# Altium PCB BATTERY_BOARD.PcbDoc
Units mm, origin at the board's own origin, x right, y up, seen from the top; angles counter-clockwise.
Board outline 51 x 49.23 mm, 2 copper layers (Top Layer, Bottom Layer), stack 1.071 mm thick; 36 components, 28 nets, 113 pads, 24 vias.
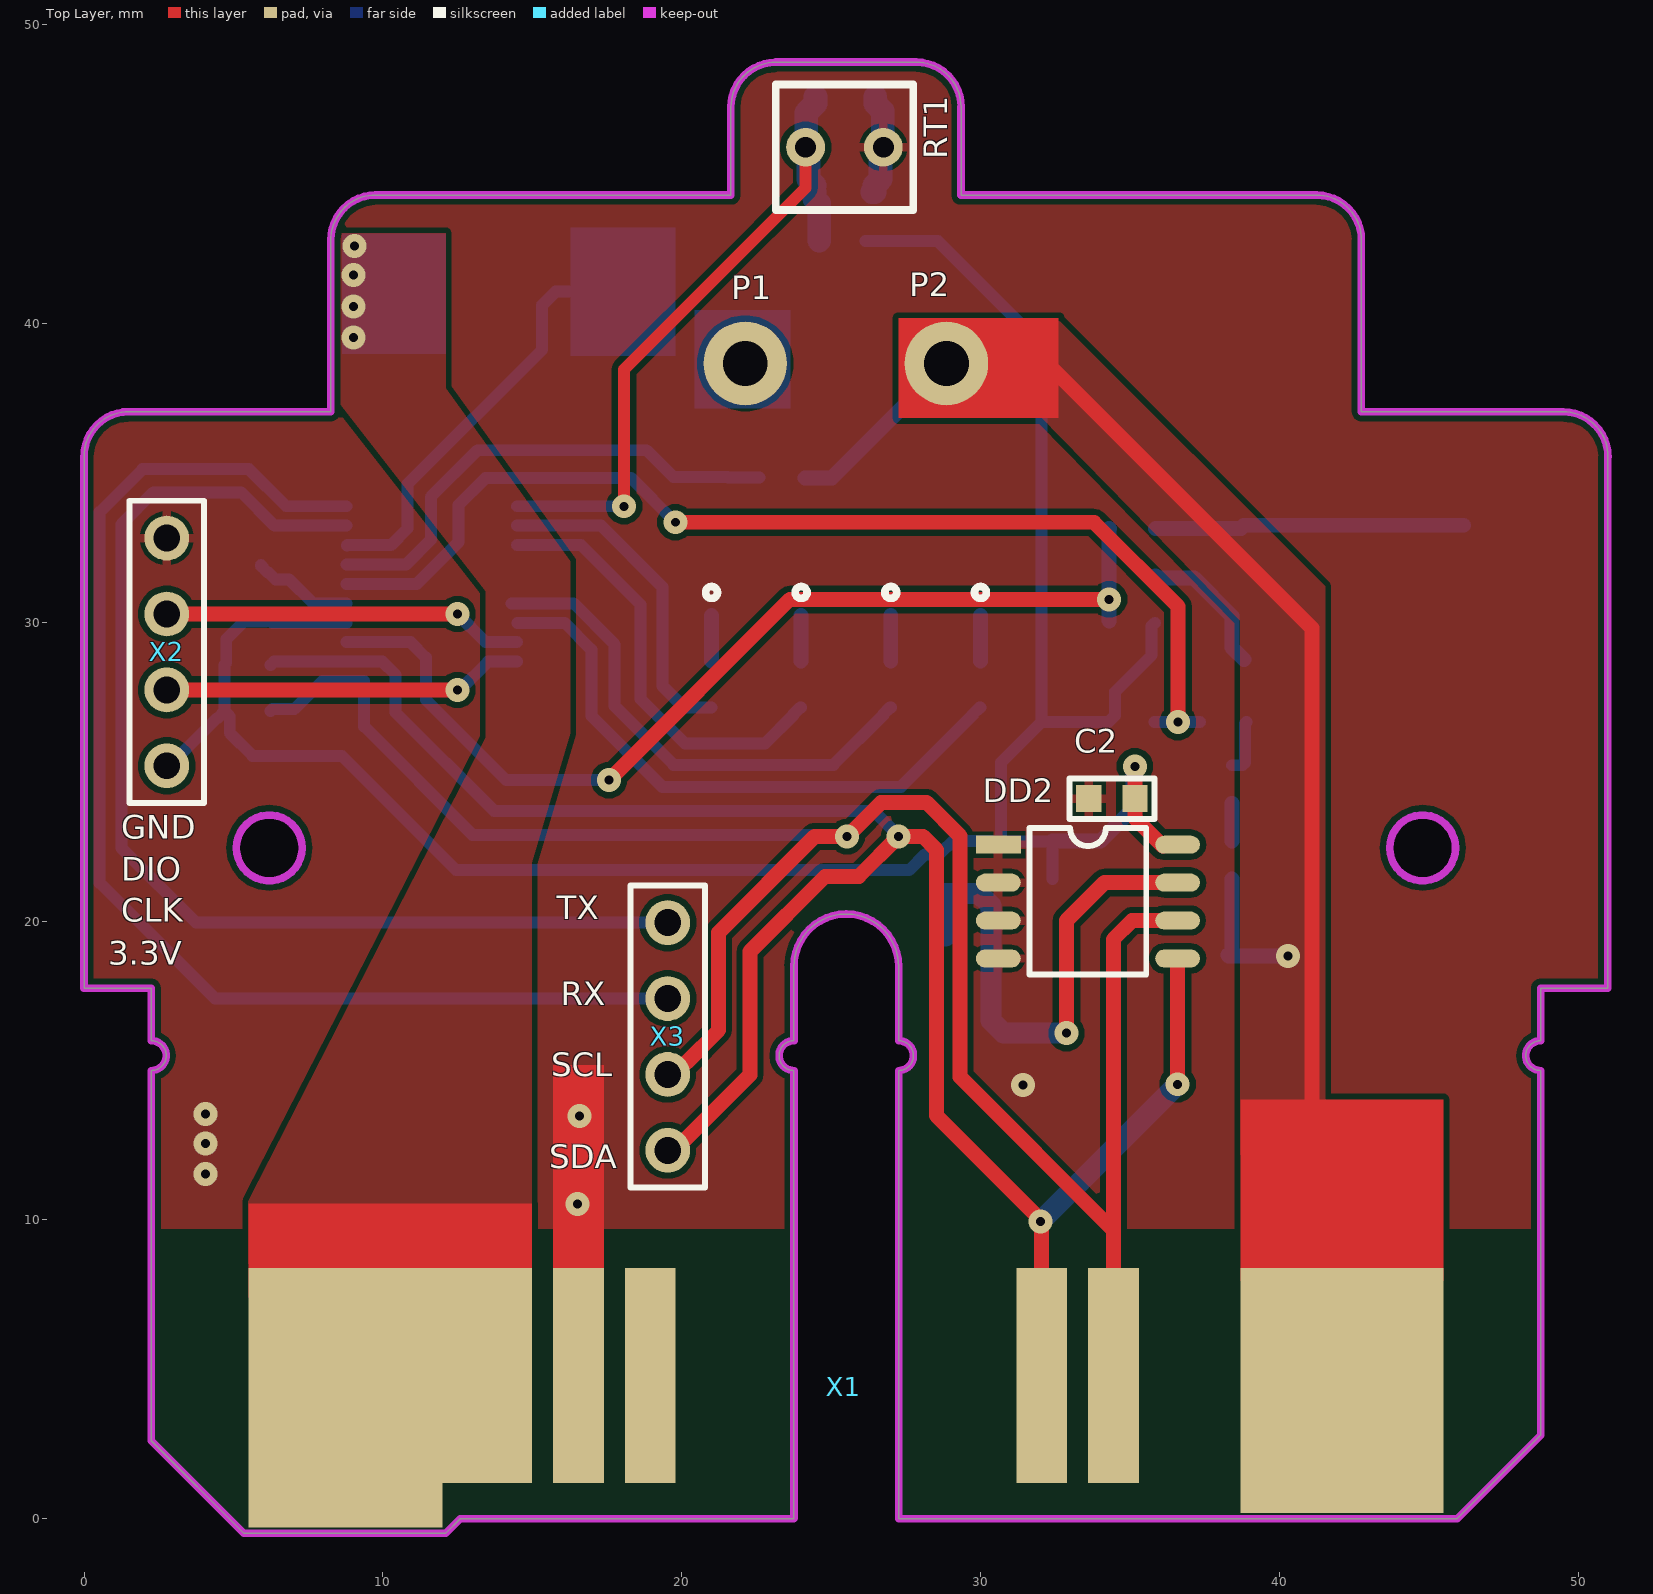
[diagram p0: Top Layer view]
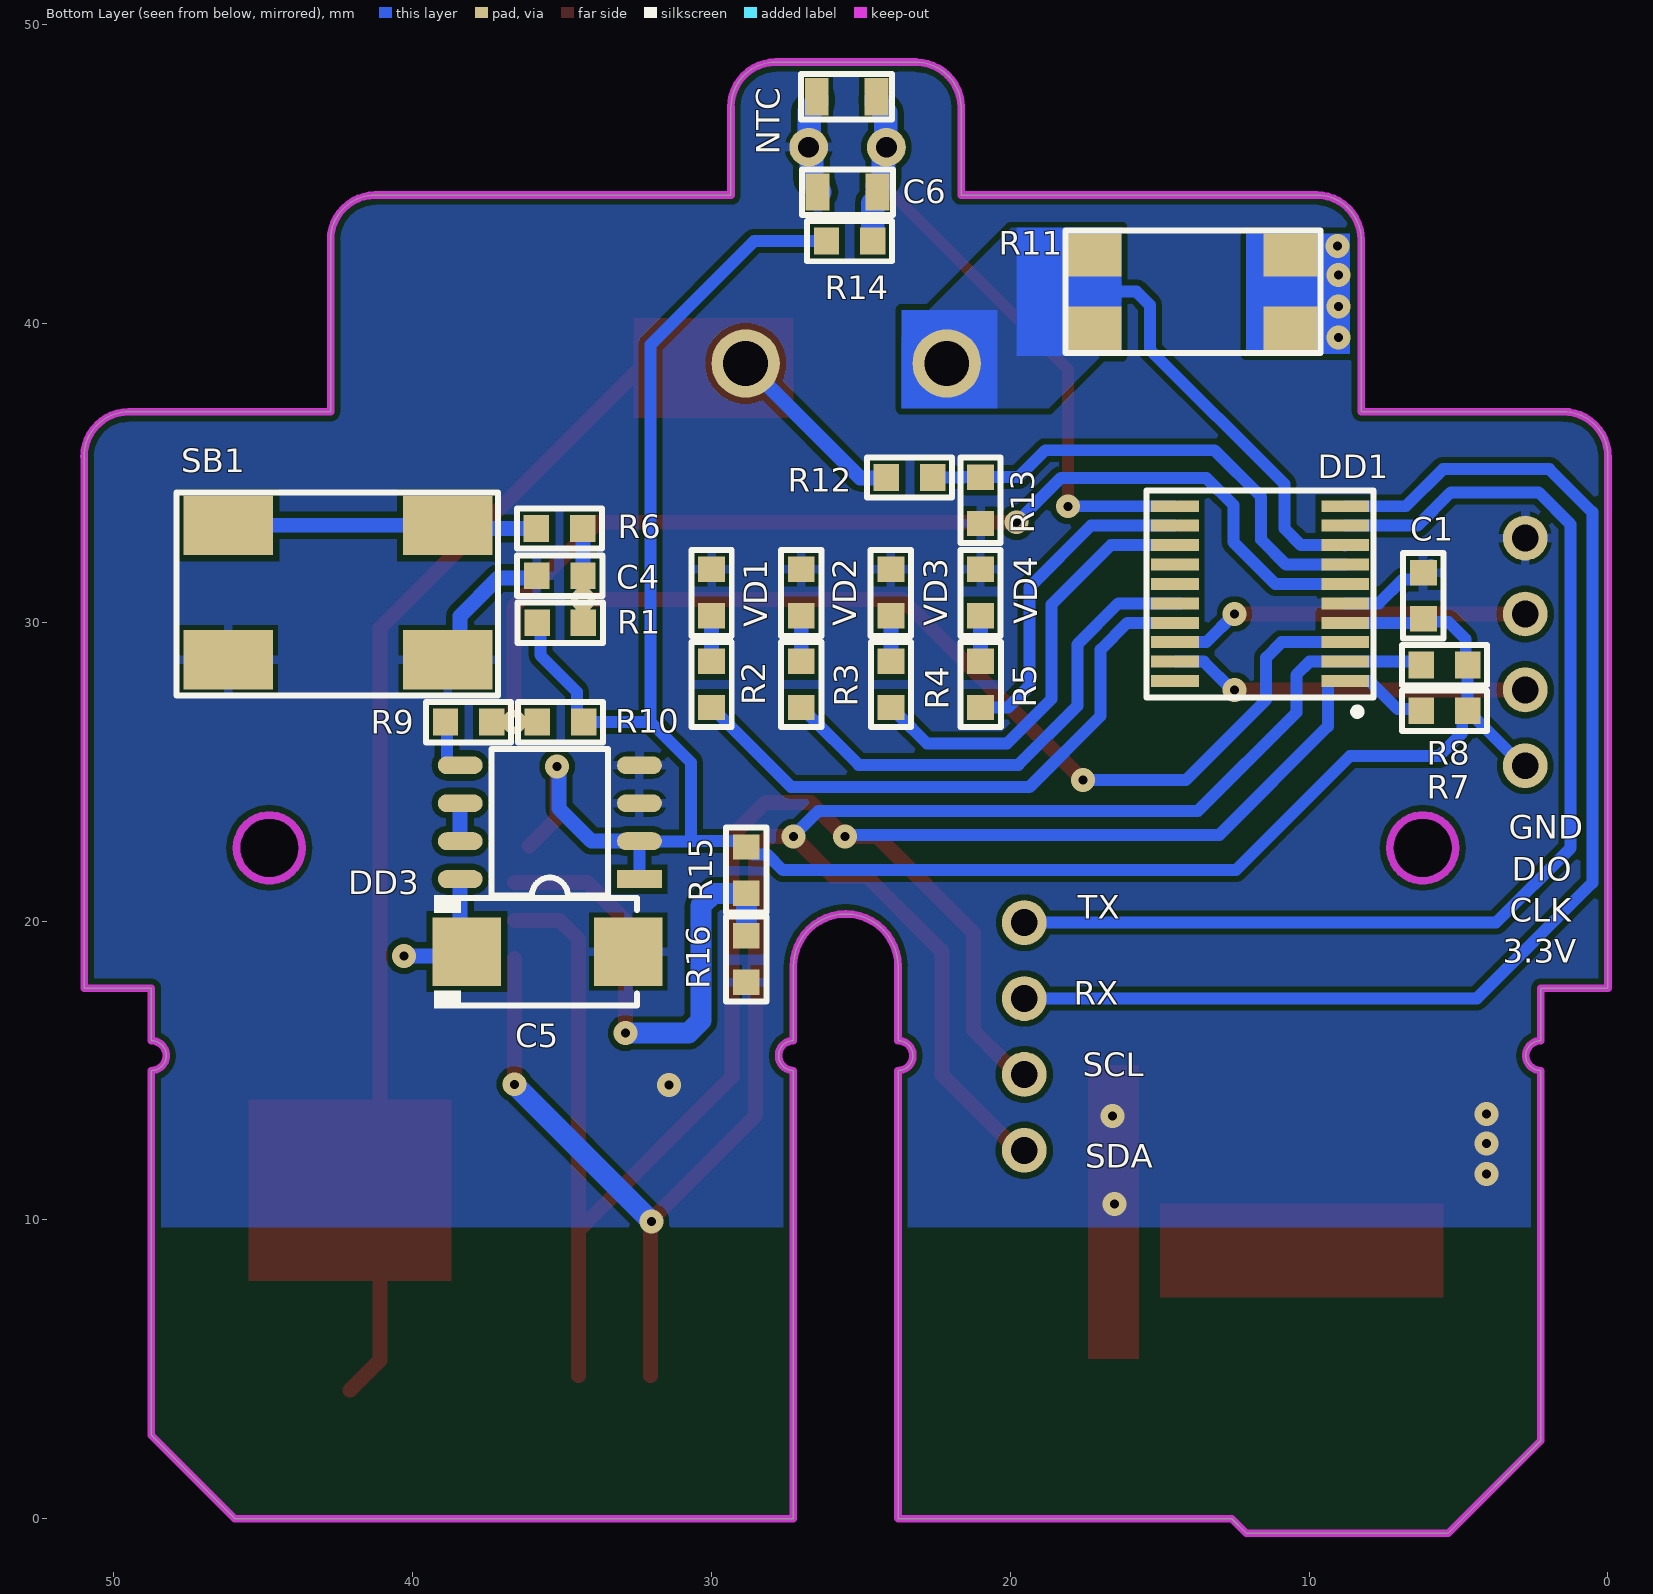
[diagram p1: Bottom Layer view, seen from below]
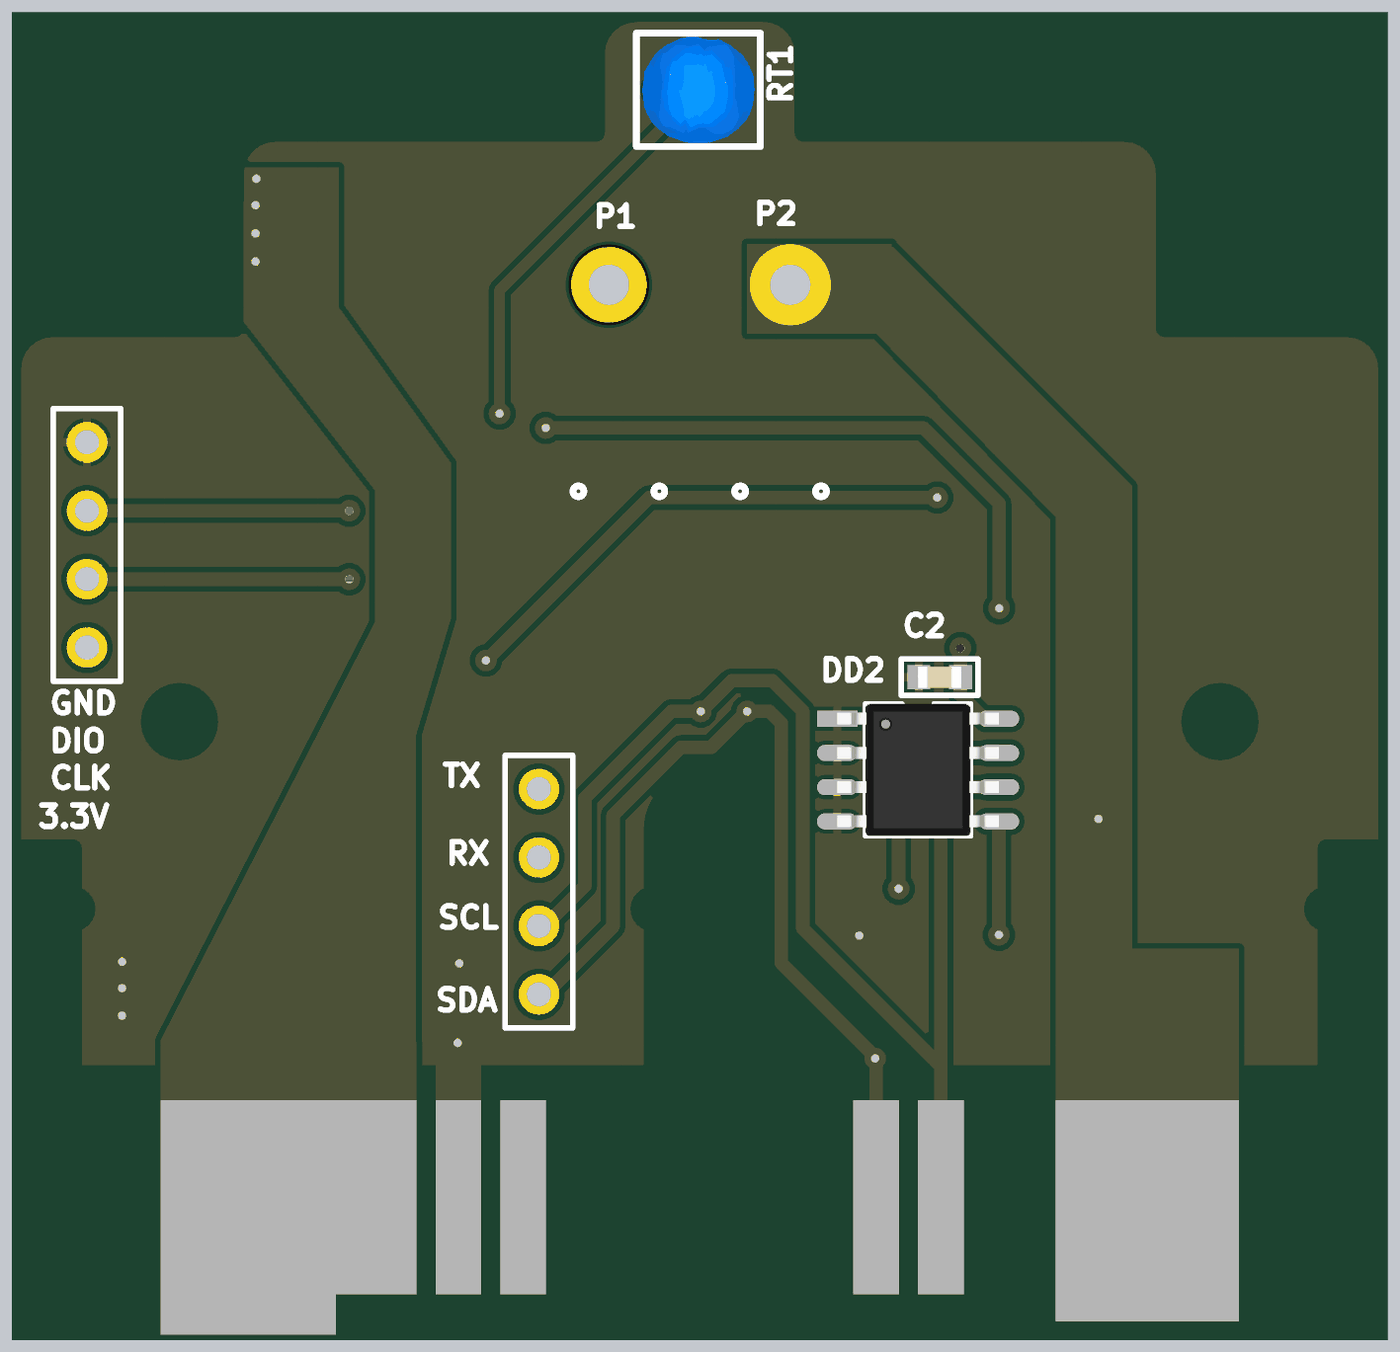
[diagram p2: 3D render of the assembled board from above, using the file's embedded part models]
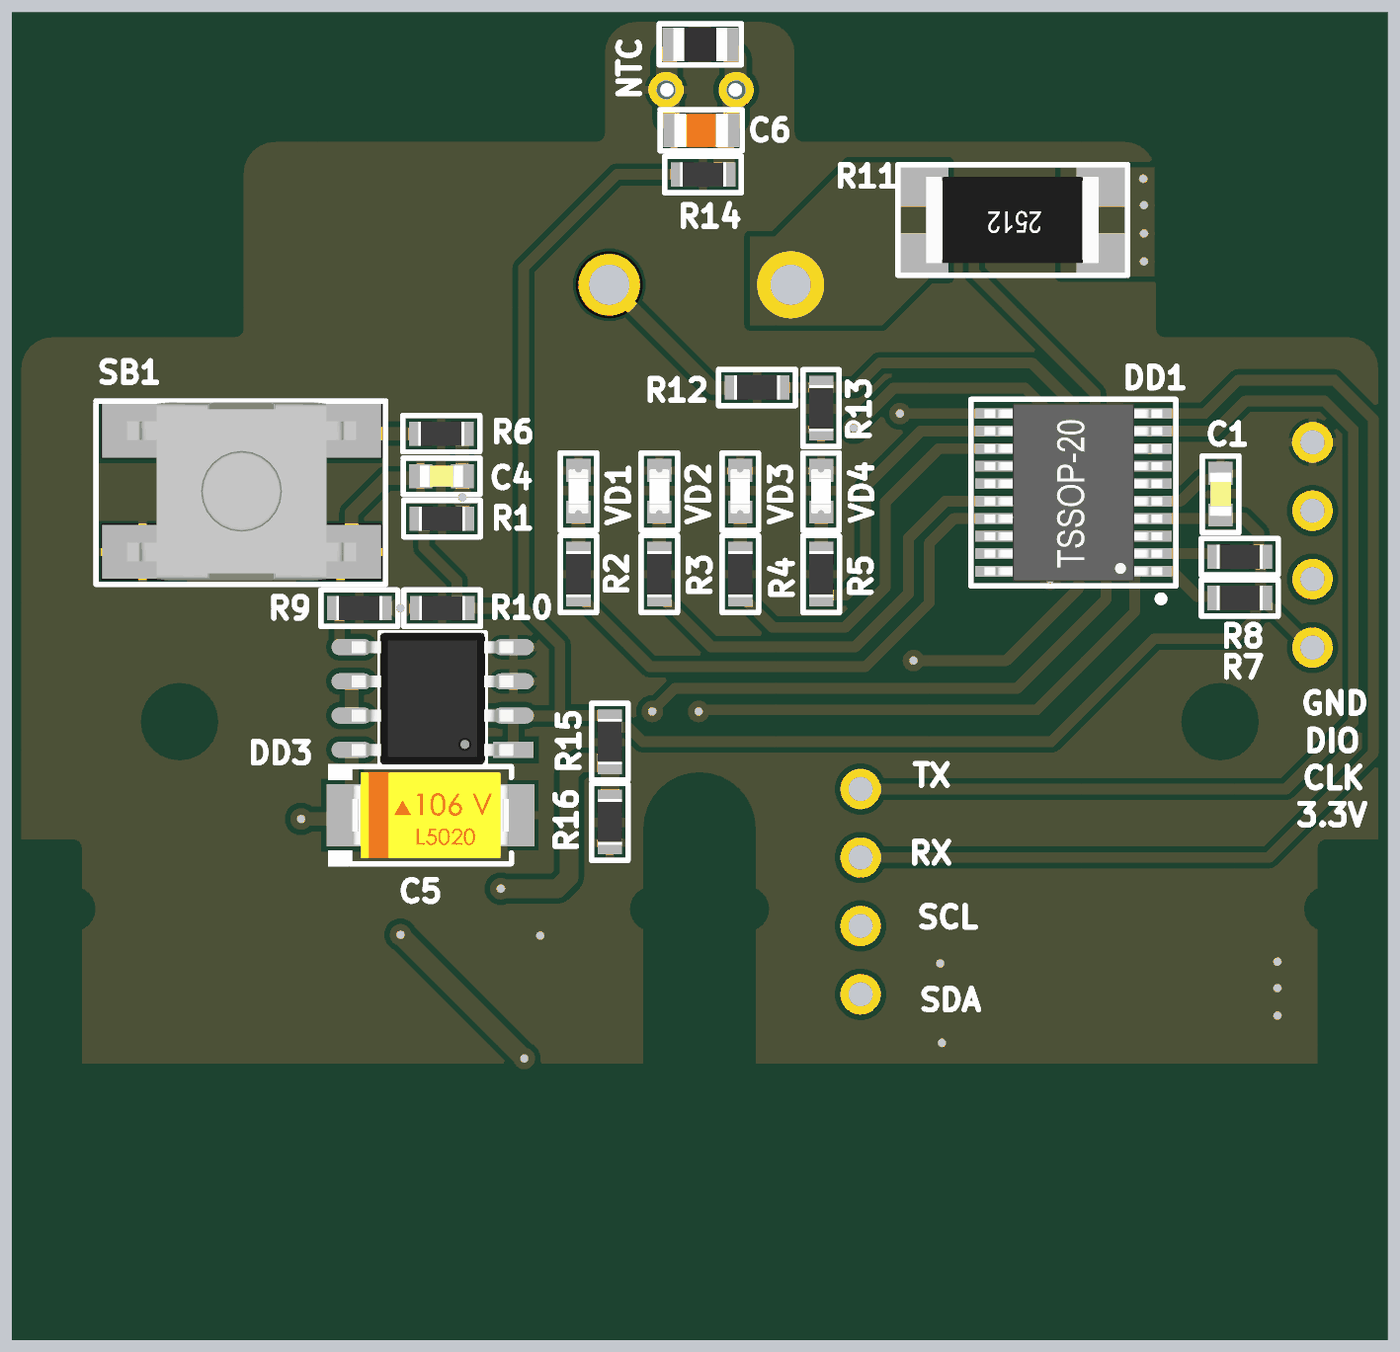
[diagram p3: 3D render of the assembled board from below, using the file's embedded part models]

## Layer stack, top to bottom
Top Solder: solder mask 0.0102, Solder Resist, Dk 3.5
Top Layer: signal copper 0.0356
Dielectric 1: dielectric 1, FR-4, Dk 4.8
Bottom Layer: signal copper 0.0356
Bottom Solder: solder mask 0.0102, Solder Resist, Dk 3.5

## Board outline
2.25,2.61 2.25,15 ccw(c2.25,15.5) 2.25,16 2.25,17.752 0,17.752 0,35.552 cw(c1.5,35.552) 1.5,37.052 8.25,37.052 8.25,42.802 8.26,42.802 cw(c9.76,42.802) 9.76,44.302 9.75,44.302 21.65,44.302 21.65,47.242 cw(c23.15,47.242) 23.15,48.742 23.15,48.752 27.85,48.752 27.852,48.75 cw(c27.852,47.25) 29.352,47.25 29.35,47.252 29.35,44.302 41.25,44.302 41.252,44.3 cw(c41.252,42.8) 42.752,42.8 42.75,42.802 42.75,37.052 49.5,37.052 49.502,37.05 cw(c49.502,35.55) 51.002,35.55 51,35.552 51,17.752 48.75,17.752 48.75,16 ccw(c48.75,15.5) 48.75,15 48.75,2.802 45.95,0.002 27.26,0.002 27.26,15 ccw(c27.26,15.5) 27.26,16 27.26,18.49 ccw(c25.51,18.49) 23.76,18.49 23.76,16 ccw(c23.76,15.5) 23.76,15 23.76,0.012 23.75,0.002 12.592,0.002 12.11,-0.48 5.34,-0.48
cut-out: 43.7,22.452 ccw(c44.8,22.452) 44.8,21.352 ccw(c44.8,22.452) 45.9,22.452 ccw(c44.8,22.452) 44.8,23.552 ccw(c44.8,22.452)
cut-out: 5.1,22.452 ccw(c6.2,22.452) 6.2,21.352 ccw(c6.2,22.452) 7.3,22.452 ccw(c6.2,22.452) 6.2,23.552 ccw(c6.2,22.452)

## Design rules (kind name [scope] priority, off if disabled: settings)
Clearance [All] p1: gap=0.2 ignorepadtopadclearanceinfootprint=FALSE except(0.05: Arc-Arc Arc-Track Arc-SMDPad Track-Track Track-SMDPad)
DiffPairsRouting [All] p1: maxlimit=0.254 minlimit=0.254 mostfreqgap=0.254 substack1={A23D90DD-733B-49C5-8102-56B3D284E3A0} toplayer_{a23d90dd-733b-49c5-8102-56b3d284e3a0}_minwidth=0.381 toplayer_{a23d90dd-733b-49c5-8102-56b3d284e3a0}_maxwidth=0.381 toplayer_{a23d90dd-733b-49c5-8102-56b3d284e3a0}_prefwidth=0.381 bottomlayer_{a23d90dd-733b-49c5-8102-56b3d284e3a0}_minwidth=0.381 bottomlayer_{a23d90dd-733b-49c5-8102-56b3d284e3a0}_maxwidth=0.381 bottomlayer_{a23d90dd-733b-49c5-8102-56b3d284e3a0}_prefwidth=0.381 toplayer_minwidth=0.381 toplayer_maxwidth=0.381 toplayer_prefwidth=0.381 bottomlayer_minwidth=0.381 bottomlayer_maxwidth=0.381 bottomlayer_prefwidth=0.381 substack2={0B3DB408-A969-412D-8C07-BA8AE97219D9} toplayer_{0b3db408-a969-412d-8c07-ba8ae97219d9}_minwidth=0.381 toplayer_{0b3db408-a969-412d-8c07-ba8ae97219d9}_maxwidth=0.381 toplayer_{0b3db408-a969-412d-8c07-ba8ae97219d9}_prefwidth=0.381 bottomlayer_{0b3db408-a969-412d-8c07-ba8ae97219d9}_minwidth=0.381 bottomlayer_{0b3db408-a969-412d-8c07-ba8ae97219d9}_maxwidth=0.381 bottomlayer_{0b3db408-a969-412d-8c07-ba8ae97219d9}_prefwidth=0.381 substack3={378827E6-B38F-4565-9D2F-710D8D441C30} toplayer_{378827e6-b38f-4565-9d2f-710d8d441c30}_minwidth=0.381 toplayer_{378827e6-b38f-4565-9d2f-710d8d441c30}_maxwidth=0.381 toplayer_{378827e6-b38f-4565-9d2f-710d8d441c30}_prefwidth=0.381 bottomlayer_{378827e6-b38f-4565-9d2f-710d8d441c30}_minwidth=0.381 bottomlayer_{378827e6-b38f-4565-9d2f-710d8d441c30}_maxwidth=0.381 bottomlayer_{378827e6-b38f-4565-9d2f-710d8d441c30}_prefwidth=0.381 substack4={1E65D4A7-266F-4925-B814-5E9C4A66F8EE} toplayer_{1e65d4a7-266f-4925-b814-5e9c4a66f8ee}_minwidth=0.381 toplayer_{1e65d4a7-266f-4925-b814-5e9c4a66f8ee}_maxwidth=0.381 toplayer_{1e65d4a7-266f-4925-b814-5e9c4a66f8ee}_prefwidth=0.381 bottomlayer_{1e65d4a7-266f-4925-b814-5e9c4a66f8ee}_minwidth=0.381 bottomlayer_{1e65d4a7-266f-4925-b814-5e9c4a66f8ee}_maxwidth=0.381 bottomlayer_{1e65d4a7-266f-4925-b814-5e9c4a66f8ee}_prefwidth=0.381 substack5={93C5D03E-862D-45F8-9871-970EEA9B3F11} toplayer_{93c5d03e-862d-45f8-9871-970eea9b3f11}_minwidth=0.381 toplayer_{93c5d03e-862d-45f8-9871-970eea9b3f11}_maxwidth=0.381 toplayer_{93c5d03e-862d-45f8-9871-970eea9b3f11}_prefwidth=0.381 bottomlayer_{93c5d03e-862d-45f8-9871-970eea9b3f11}_minwidth=0.381 bottomlayer_{93c5d03e-862d-45f8-9871-970eea9b3f11}_maxwidth=0.381 bottomlayer_{93c5d03e-862d-45f8-9871-970eea9b3f11}_prefwidth=0.381 maxuncoupledlength=12.7
Height [All] p1: minheight=0 maxheight=44 prefheight=12.7
HoleSize [All] p1: absolutevalues=TRUE maxlimit=6 minlimit=0.01 maxpercent=80.000 minpercent=20.000
HoleToHoleClearance [All] p1: gap=0.1 allowstackedmicrovias=TRUE
MinimumSolderMaskSliver [All] p1: minsoldermaskwidth=0.1
PlaneConnect [All] p1: pad.planeconnectstyle=Relief pad.reliefexpansion=0.5 pad.reliefentries=4 pad.reliefconductorwidth=0.5 pad.reliefairgap=0.15 via.planeconnectstyle=Direct via.reliefexpansion=0.5 via.reliefentries=4 via.reliefconductorwidth=0.5 via.reliefairgap=0.15
PolygonConnect VQFN20 [HasFootprint('VQFN20')] p1: connectstyle=Direct reliefconductorwidth=0.254 reliefentries=4 polygonreliefangle="90 Angle" airgapwidth=0.254
PolygonConnect [All] p2: thpad.connectstyle=Relief thpad.reliefconductorwidth=0.3 thpad.reliefentries=4 thpad.polygonreliefangle="90 Angle" thpad.airgapwidth=0.15 smdpad.connectstyle=Relief smdpad.reliefconductorwidth=0.3 smdpad.reliefentries=4 smdpad.polygonreliefangle="90 Angle" smdpad.airgapwidth=0.15 via.connectstyle=Direct via.reliefconductorwidth=0.3 via.reliefentries=4 via.polygonreliefangle="90 Angle" via.airgapwidth=0.15
RoutingVias [All] p1: holewidth=0.1 width=0.1 viastyle="Through Hole" minholewidth=0.11 minwidth=0.1 maxholewidth=2 maxwidth=1
ShortCircuit [All] p1: allowed=TRUE
SilkToSolderMaskClearance [IsPad] p1: minsilkscreentomaskgap=0.1 clearancetoexposedcopper=TRUE
SolderMaskExpansion SolderMaskExpansion_Via [IsVia] p1: expansion=0.102 istentingtop=TRUE
SolderMaskExpansion [All] p2: expansion=0.01 istentingtop=FALSE
UnRoutedNet [All] p1: checkbadconnections=TRUE
Width [All] p1: maxlimit=5 minlimit=0.2 preferedwidth=0.3 substack1={A23D90DD-733B-49C5-8102-56B3D284E3A0} substack2={0B3DB408-A969-412D-8C07-BA8AE97219D9} substack3={378827E6-B38F-4565-9D2F-710D8D441C30} substack4={1E65D4A7-266F-4925-B814-5E9C4A66F8EE} substack5={93C5D03E-862D-45F8-9871-970EEA9B3F11}
21 further rules are at their usual default settings.

## Components (designator, comment, footprint, x,y, rotation, side; value= is the part's Value field where it differs from the comment)
C1 "CAP-NON-POLAR" CAP-0603 6.18,30.89 r270 bottom
C2 "CAP-NON-POLAR" CAP-0603 34.4,24.1 r0 top
C4 "100nF" CAP-0603 35.08,31.56 r180 bottom
C5 "CAP-POLAR" CAP-TAN-C 35.49,18.98 r180 bottom
C6 "CAP-NON-POLAR" CAP-0805 25.45,44.4 r180 bottom
DD1 "STM32G030F6P6TR" TSSOP-20 11.64,30.96 r0 bottom locked
DD2 "24C256" SO8-150 33.6,20.66 r0 top
DD3 "LP2951" SO8-150 35.413,23.307 r0 bottom
NTC "RES-CONST" RES-0805 25.481,47.59 r180 bottom
P1 "Test_Point_PCB" Point 22.13,38.665 r0 top locked
P2 "Test_Point_PCB" Point 28.86,38.665 r0 top locked
R1 "10K" RES-0603 35.063,29.985 r0 bottom
R2 "220" RES-0603 30,27.925 r270 bottom locked
R3 "220" RES-0603 27,27.925 r270 bottom locked
R4 "220" RES-0603 23.995,27.925 r270 bottom locked
R5 "220" RES-0603 20.995,27.925 r270 bottom locked
R6 "1K" RES-0603 35.09,33.14 r0 bottom
R7 "10K" RES-0603 5.47,27.04 r0 bottom
R8 "10K" RES-0603 5.47,28.57 r0 bottom
R9 "10K" RES-0603 38.13,26.66 r0 bottom
R10 "10K" RES-0603 35.057,26.66 r0 bottom
R11 "100m" RES-2512 13.9,41.07 r0 bottom
R12 "51K" RES-0603 23.375,34.85 r180 bottom
R13 "10K" RES-0603 21,34.085 r270 bottom
R14 "10K" RES-0603 25.38,42.76 r180 bottom
R15 "10K" RES-0603 28.84,21.707 r270 bottom
R16 "10K" RES-0603 28.84,18.73 r270 bottom
RT1 "RES-TEMP" NTC_MF52 25.45,45.9 r180 top
SB1 "BUTTON-TACT-4PIN" "TACTB-6x6 SMD" 42.5,31 r180 bottom locked
VD1 "LED" LED-0603 30,31 r270 bottom locked
VD2 "LED" LED-0603 27,31 r270 bottom locked
VD3 "LED" LED-0603 24,31 r270 bottom locked
VD4 "LED" LED-0603 21,31 r270 bottom locked
X1 "CONN-6-PIN" CON_6PIN_BATT_DEFIBRILLATOR 25.5,4.8 r180 top locked
X2 "CONN-4-PIN" CONN-PLS-4-2.54mm 2.77,25.2 r90 top locked
X3 "CONN-4-PIN" CONN-PLS-4-2.54mm 19.535,12.33 r90 top

## Footprints (in the part's own frame and the unit in brackets; to place one, negate y for a bottom-side part, rotate by r counter-clockwise, add the part's x,y. Pads: shape width x height; smd on the part's side, far side on the other; paste and mask are expansions set on the pad)
CAP-0603 [mm]
  rect 0.85x0.9 smd: 1(-0.775,0) 2(0.775,0)
  silkscreen extent -1.43,-0.67 1.43,0.67, body extent -0.8,-0.4 0.8,0.4, height 0.8
CAP-0805 [mm]
  rect 0.8x1.25 smd mask+0.015: 1(-1,0) 2(1,0)
  silkscreen extent -1.52,-0.76 1.52,0.76, body extent -1,-0.62 1,0.63, height 0.8
CAP-TAN-C [mm]
  rect 2.3x2.3 smd: 1(-2.7,0) 2(2.7,0)
  silkscreen extent -3.8,-1.9 3,1.9, body extent -2.9,-1.6 2.9,1.6, height 2.6
CON_6PIN_BATT_DEFIBRILLATOR [mm]
  rect 9.5x7.2 smd: 1(15.25,0)
  rect 6.5x8.7 smd: 1(16.75,0.75)
  rect 1.7x7.2 smd: 2(8.95,0) 3(6.55,0) 4(-6.55,0) 5(-8.95,0)
  rect 6.8x8.2 smd: 6(-16.6,0.5)
CONN-PLS-4-2.54mm [mm]
  round 1.5 hole 0.9: 1(0,0) 2(2.54,0) 3(5.08,0) 4(7.62,0)
  silkscreen extent -1.25,-1.25 8.87,1.25
LED-0603 [mm]
  rect 0.85x0.9 smd: 1(-0.775,0) 2(0.775,0)
  silkscreen extent -1.43,-0.67 1.45,0.67, body extent -0.82,-0.36 0.83,0.36, height 0.68
NTC_MF52 [mm]
  round 1.3 hole 0.7: 1(-1.3,0) 2(1.3,0)
  silkscreen extent -2.3,-2.1 2.3,2.1, body extent -2.1,-2 2.08,2, height 33
Point [mm]
  round 2.8 / inner round 2.286 / far side round 2.286 hole 1.5 paste+0.102 mask+0.102: 1(0,0)
RES-0603 [mm]
  rect 0.85x0.9 smd: 1(-0.775,0) 2(0.775,0)
  silkscreen extent -1.43,-0.67 1.43,0.67, body extent -0.85,-0.45 0.85,0.45, height 0.55
RES-0805 [mm]
  rect 0.8x1.25 smd mask+0.015: 1(-1,0) 2(1,0)
  silkscreen extent -1.52,-0.76 1.52,0.76, body extent -1,-0.62 1,0.63, height 0.6
RES-2512 [mm]
  rect 1.8x1.45 smd: 1(-3.275,-1.225) 1(-3.275,1.225) 2(3.275,-1.225) 2(3.275,1.225)
  silkscreen extent -4.28,-2.05 4.25,2.05, body extent -3.2,-1.6 3.2,1.6, height 0.6
SO8-150 [mm]
  rect 1.5x0.6 smd: 1(-3,1.9)
  oval 1.5x0.6 smd: 2(-3,0.63) 3(-3,-0.64) 4(-3,-1.91) 5(3,-1.91) 6(3,-0.64) 7(3,0.63) 8(3,1.9)
  silkscreen extent -1.95,-2.45 1.95,2.45, body extent -3,-2.45 3,2.45, height 1.7
"TACTB-6x6 SMD" [mm]
  rect 3x2 smd paste+0 mask+0.05: 1(-3.675,2.25) 2(3.675,2.25) 3(-3.675,-2.25) 4(3.675,-2.25)
  silkscreen extent -5.4,-3.45 5.35,3.35, body extent -4.25,-3.3 4.25,3.3, height 3.7
TSSOP-20 [mm]
  rect 1.6x0.4 smd: 1(-2.85,2.925) 2(-2.85,2.275) 3(-2.85,1.625) 4(-2.85,0.975) 5(-2.85,0.325) 6(-2.85,-0.325) 7(-2.85,-0.975) 8(-2.85,-1.625) 9(-2.85,-2.275) 10(-2.85,-2.925) 11(2.85,-2.925) 12(2.85,-2.275) 13(2.85,-1.625) 14(2.85,-0.975) 15(2.85,-0.325) 16(2.85,0.325) 17(2.85,0.975) 18(2.85,1.625) 19(2.85,2.275) 20(2.85,2.925)
  silkscreen extent -3.8,-3.45 3.8,4.06, body extent -3.3,-3.3 3.3,3.3, height 1.2

## Part data
C4: library part CAP-NON-POLAR
P1 P2: library part POINT
R1 R2 R3 R4 R5 R6 R7 R8 R9 R10 R11 R12 R13 R14 R15 R16: library part RES-CONST

## Via types
v1: diameter 0.8, hole 0.3, Top Layer to Bottom Layer, tented both sides, 24 vias

## Nets (pads, with @x,y where several pads share a name; then routed paths per layer and width w, separated by ;. In a path a pad name is that pad's centre, name@x,y a point inside that pad or via, vN(x,y) a via of type N, cw(c..) or ccw(c..) an arc to the next point about the centre after c; other vN are vias at no path point)
3.3V: C1.2 C2.2 DD1.4 DD2.8 DD3.1 DD3.2 R1.2 R7.1 R8.1 R10.1 R14.1 R15.1 X2.1 | length 79.7
  Top Layer w0.5: v1(35.17,25.18) 35.17,23.443 DD2.8@36.102,22.512
  Bottom Layer w0.4: X2.1 2.855,25.2 4.445,26.79 4.47,26.79 4.695,27.015 R7.1 ; DD1.4 6.31,29.985 C1.2 6.085,30.02 5.34,30.02 4.76,29.44 4.76,28.635 R8.1 R7.1 ; R14.1 28.58,42.76 32.04,39.3 32.04,26.66 ; R15.1@28.84,22.46 28.615,22.235 28.145,22.235 27.617,21.707 12.453,21.707 8.63,25.53 5.646,25.53 4.877,26.299 4.877,26.858 R7.1 ; R15.1@28.915,22.51 29.09,22.685 30.687,22.685 ; DD3.1 DD3.2@32.413,22.66 ; DD3.2 DD3.2@32.413,22.66 ; R1.2 35.73,29.877 35.73,28.9 34.507,27.677 34.507,26.885 R10.1 32.04,26.66 ; 32.04,26.66 30.687,25.307 30.687,22.66 DD3.2@32.413,22.66
  Bottom Layer w0.5: DD3.2 34.017,22.677 35.113,23.773 35.113,25.123 v1(35.17,25.18)
12V: C5.1 DD3.8 P2.1 R12.1 X1.6 | length 52.9
  Top Layer w0.5: P2.1@28.86,38.82 P2.1 32.235,38.665 41.095,29.805 41.095,5.305 X1.6
  Bottom Layer w0.5: R12.1@24.132,34.837 25.032,34.837 P2.1 ; DD3.8 38.413,18.995 38.278,18.86 38.298,18.84 v1(40.29,18.84)
BUTTON: C4.2 DD1.3 R1.1 R6.1 | length 33.9
  Top Layer w0.5: v1(17.57,24.72) 23.62,30.77 v1(34.308,30.77)
  Bottom Layer w0.4: DD1.3 10.926,29.335 11.44,28.821 11.44,27.41 14.13,24.72 v1(17.57,24.72)
  Bottom Layer w0.5: R1.1@34.311,30.045 34.298,30.058 34.298,30.761 v1(34.308,30.77) 34.308,31.557 C4.2 34.31,31.565 34.31,33.135 R6.1
CLK: DD1.19 X2.2 | length 12.1
  Top Layer w0.5: X2.2@2.81,27.715 2.833,27.738 12.498,27.738 v1(12.5,27.735)
  Bottom Layer w0.4: v1(12.5,27.735) 12.575,27.735 13.525,28.685 DD1.19
DIO: DD1.18 X2.3 | length 12.1
  Top Layer w0.5: X2.3@2.852,30.468 3.041,30.28 v1(12.498,30.28)
  Bottom Layer w0.4: v1(12.498,30.28) 13.443,29.335 DD1.18
GND: C1.1 C2.1 C4.1 C5.2 C6.1 DD1.5 DD2.1 DD2.2 DD2.3 DD2.4 DD3.3 DD3.4 NTC.1 R13.2 R16.2 RT1.1 SB1.3 SB1.4 VD1.1 VD2.1 VD3.1 VD4.1 X1.2 X2.4 | length 11.6
  Bottom Layer w0.4: C1.1@5.93,31.915 5.93,31.89 6.155,31.665 C1.1 6.405,31.44 6.86,31.44 7.665,30.635 DD1.5
  Bottom Layer w0.5: C4.1 35.931,31.484 37.146,31.484 38.423,30.207 38.423,29.152 SB1.4
  Bottom Layer w0.8: C6.1@26.38,44.4 C6.1@26.445,44.465 ; C6.1 26.45,44.625 26.654,44.83 26.654,45.804 RT1.1 ; NTC.1 26.481,47.365 26.73,47.116 RT1.1@26.73,45.92
  other v1: 16.52,10.53 4.07,11.54 4.07,12.56 16.58,13.48 4.07,13.54 31.42,14.51
GND_IN: R11.1 X1.1
  other v1: 9.02,39.53 9.02,40.57 9.02,41.62 9.05,42.6
I_SENS: DD1.8 P1.1 R11.2 | length 13.8
  Bottom Layer w0.4: DD1.8@8.803,32.573 8.815,32.585 10.275,32.585 10.824,33.134 10.824,34.624 15.33,39.13 15.33,40.62 15.78,41.07 17.36,41.07
LED_1: DD1.17 R2.2 | length 20.2
  Bottom Layer w0.4: DD1.17@14.51,29.985 16.085,29.985 16.982,29.088 16.982,26.868 19.36,24.49 27.34,24.49 29.75,26.9 29.75,26.925 29.975,27.15 R2.2
LED_2: DD1.16 R3.2 | length 17
  Bottom Layer w0.4: DD1.16@14.305,30.635 16.385,30.635 17.76,29.26 17.76,27.2 19.73,25.23 25.08,25.23 26.75,26.9 26.75,26.925 26.975,27.15 R3.2
LED_3: DD1.13 R4.2 | length 14.6
  Bottom Layer w0.4: DD1.13 16.636,32.585 18.62,30.601 18.62,27.44 20.11,25.95 22.794,25.95 23.745,26.9 23.745,26.925 23.97,27.15 R4.2
LED_4: DD1.12 R5.2 | length 11
  Bottom Layer w0.4: DD1.12 17.305,33.235 19.36,31.18 19.36,27.87 20.08,27.15 R5.2
NetDD3_5: DD3.5 R9.2 | length 1.9
  Bottom Layer w0.4: DD3.5 38.768,25.217 38.86,25.309 38.86,26.615 R9.2
NetDD3_6: DD3.6 DD3.7 | length 1.3
  Bottom Layer w0.5: DD3.7 DD3.6
NetR2_1: R2.1 VD1.2 | length 1.5
  Bottom Layer w0.5: R2.1 VD1.2
NetR3_1: R3.1 VD2.2 | length 1.5
  Bottom Layer w0.5: R3.1 VD2.2
NetR4_1: R4.1 VD3.2 | length 1.5
  Bottom Layer w0.4: R4.1 R4.1@23.997,28.703 ; VD3.2@23.997,30.222 VD3.2
  Bottom Layer w0.5: R4.1@23.997,28.703 VD3.2@23.997,30.222
NetR5_1: R5.1 VD4.2 | length 1.5
  Bottom Layer w0.4: R5.1 R5.1@20.997,28.703 ; VD4.2@20.997,30.222 VD4.2
  Bottom Layer w0.5: R5.1@20.997,28.703 VD4.2@20.997,30.222
NetR6_2: R6.2 SB1.1 SB1.2 | length 10.4
  Bottom Layer w0.5: R6.2 38.715,33.14 SB1.2 SB1.1
RESET: DD1.6 R9.1 R10.2 | length 37.2
  Top Layer w0.5: v1(19.79,33.35) 33.796,33.35 36.61,30.536 v1(36.61,26.66)
  Bottom Layer w0.4: DD1.6 11.135,31.285 12.54,32.69 12.54,33.93 13.44,34.83 18.31,34.83 v1(19.79,33.35) ; R10.2 v1(36.61,26.66) R9.1
RESET_+3.3v: X1.3
RX: DD1.10 X3.3 | length 42.4
  Bottom Layer w0.4: DD1.10 6.765,33.885 5.52,35.13 1.96,35.13 0.52,33.69 0.52,21.28 4.39,17.41 X3.3
SCL: DD1.1 DD2.6 R7.2 X1.5 X3.2 | length 70.8
  Top Layer w0.5: X3.2@19.76,14.879 20.151,15.27 20.16,15.27 21.24,16.35 21.24,19.62 24.45,22.83 v1(25.54,22.83) 26.68,23.97 28.2,23.97 29.32,22.85 29.32,14.79 34.45,9.66 ; X1.5 34.45,9.66 ; DD2.6 35.08,20.02 34.45,19.39 34.45,9.66
  Bottom Layer w0.4: R7.2 6.301,27.096 7.036,27.096 7.975,28.035 DD1.1 9.372,28.035 9.372,26.518 13.001,22.889 25.481,22.889 v1(25.54,22.83)
SDA: DD1.2 DD2.5 R8.2 X1.4 X3.1 | length 69.7
  Top Layer w0.5: X3.1@19.76,12.33 22.288,14.858 22.288,18.983 24.805,21.5 25.93,21.5 v1(27.26,22.83) 28.084,22.83 28.53,22.384 28.53,13.49 v1@32.04,9.98 ; X1.4 v1@32.05,9.95 ; v1(36.6,14.54) DD2.5
  Bottom Layer w0.4: R8.2 6.36,28.685 DD1.2 9.99,28.685 10.43,28.245 10.43,26.98 13.72,23.69 26.423,23.69 27.26,22.853 v1(27.26,22.83)
  Bottom Layer w0.7: v1(32.01,9.95) v1(36.6,14.54)
T_SENS: C6.2 DD1.11 NTC.2 R14.2 RT1.2 | length 23
  Top Layer w0.4: v1(18.075,33.885) 18.075,38.465 21.39,41.78 24.15,44.54 RT1.2
  Bottom Layer w0.4: DD1.11 v1(18.075,33.885)
  Bottom Layer w0.8: C6.2 24.45,44.175 24.605,44.02 R14.2@24.605,42.785 ; C6.2@24.45,44.625 24.246,44.83 24.246,45.804 RT1.2 24.17,45.92 24.17,47.054 24.481,47.365 NTC.2
TX: DD1.9 X3.4 | length 38.6
  Bottom Layer w0.4: DD1.9 6.375,33.235 5.26,34.35 2.32,34.35 1.254,33.284 1.254,22.446 3.75,19.95 X3.4
V_SENS: DD1.7 R12.2 R13.1 | length 16.6
  Bottom Layer w0.4: DD1.7 10.78,31.935 11.61,32.765 11.61,34.2 13.17,35.76 18.83,35.76 19.73,34.86 R13.1 21.545,34.86 21.55,34.855 22.595,34.855 R12.2
WP: DD2.7 R15.2 R16.1 | length 17.7
  Top Layer w0.5: v1(32.88,16.25) 32.88,20.02 34.15,21.29 DD2.7
  Bottom Layer w0.7: R16.1@28.83,19.505 28.83,20.93 29.94,20.93 30.35,20.52 30.35,16.67 30.77,16.25 v1(32.88,16.25)
pads on no net: DD1.14 DD1.15 DD1.20

## Polygon pours and split planes (outlines as drawn)
GND on Top Layer "NONET_L-01_P-001" (solid, remove dead copper, pour order 8): 2.16,9.7 2.25,9.7 51,9.7 51,48.769 0,48.739 0,43.67 0,9.7
GND_IN on Top Layer "NONET_L-01_P-001" (solid, pour order 6): 5.5,10.628 5.5,7.24 14.98,7.24 14.98,21.956 16.275,26.294 16.275,32.048 12.11,37.833 12.11,43.02 8.588,43.02 8.579,37.288 13.443,31.047 13.443,26.138
12V on Top Layer "NONET_L-01_P-001" (solid, pour order 5): 32.56,40.18 31.996,36.896 38.7,30.053 38.7,12.186 41.54,12.186 41.54,31.2
GND on Bottom Layer "NONET_L-01_P-001" (solid, remove dead copper, pour order 9): 2.16,9.76 2.25,9.76 51,9.76 51,48.829 0,48.799 0,43.73 0,9.76
I_SENS on Bottom Layer "NONET_L-01_P-001" (solid, pour order 7): 16.275,43.21 19.97,43.21 23.65,39.53 23.65,37.16 18.71,37.16 16.275,39.595

## Keep-outs
Keep-Out Layer:
  circle w0.254: c44.8,22.452 r1.1
  circle w0.254: c6.2,22.452 r1.1
  lines w0.254: 0,17.752 2.25,17.752 2.25,16 cw(c2.25,15.5) 2.25,15 2.25,2.61 5.34,-0.48 12.11,-0.48 12.592,0.002 19.075,0.002 23.75,0.002 ; 0,17.777 0,35.552 cw(c1.5,35.552) 1.5,37.052 8.25,37.052 8.25,42.802 ; 8.26,42.802 cw(c9.76,42.802) 9.76,44.302 ; 9.75,44.302 21.65,44.302 21.65,47.252 ; 21.65,47.242 cw(c23.15,47.242) 23.15,48.742 ; 23.15,48.752 27.85,48.752 ; 23.76,0.012 23.76,15 cw(c23.76,15.5) 23.76,16 23.76,18.49 cw(c25.51,18.49) 27.26,18.49 27.26,16 cw(c27.26,15.5) 27.26,15 27.26,0.002 45.95,0.002 48.75,2.802 48.75,15 cw(c48.75,15.5) 48.75,16 48.75,17.752 51,17.752 51,35.552 ; 27.852,48.75 cw(c27.852,47.25) 29.352,47.25 ; 29.35,44.302 29.35,47.252 ; 29.37,44.302 41.25,44.302 ; 41.252,44.3 cw(c41.252,42.8) 42.752,42.8 ; 42.75,42.802 42.75,37.052 49.5,37.052 ; 49.502,37.05 cw(c49.502,35.55) 51.002,35.55

## Other copper
Top Layer:
  rectangle net GND: 15.7,5.353 17.4,15.18
  rectangle net GND_IN: 5.5,7.4 15,10.55
  rectangle net 12V: 27.26,36.84 32.62,40.18
  rectangle net 12V: 38.7,7.96 45.502,14.03
Bottom Layer:
  rectangle net I_SENS: 20.43,37.16 23.65,40.46
  rectangle net I_SENS: 16.275,38.92 19.79,43.21
  rectangle net GND_IN: 8.63,38.98 12.11,43.02

## Silkscreen, mask and mechanical layers (free items; w line width, h text height)
Top Overlay:
  circle w0.254: c30,31 r0.2
  circle w0.254: c27,31 r0.2
  circle w0.254: c24,31 r0.2
  circle w0.254: c21,31 r0.2
  text "GND" at 1.254,22.761 h0.8
  text "DIO" at 1.254,21.354 h0.8
  text "TX" at 15.818,20.064 h0.8
  text "CLK" at 1.254,19.984 h0.8
  text "3.3V" at 0.814,18.544 h0.8
  text "RX" at 15.954,17.184 h0.8
  text "SCL" at 15.644,14.804 h0.8
  text "SDA" at 15.564,11.734 h0.8
Bottom Overlay:
  text "GND" at 3.326,22.754 h0.8
  text "DIO" at 3.216,21.354 h0.8
  text "TX" at 17.75,20.074 h0.8
  text "CLK" at 3.282,19.984 h0.8
  text "3.3V" at 3.516,18.604 h0.8
  text "RX" at 17.886,17.194 h0.8
  text "SCL" at 17.576,14.814 h0.8
  text "SDA" at 17.496,11.744 h0.8